# Altium PCB HarmonicControl_2.PcbDoc
Units mm, origin at the board's own origin, x right, y up, seen from the top; angles counter-clockwise.
Board outline 76.86 x 36.04 mm, 2 copper layers (Top Layer, Bottom Layer); 18 components, 24 nets, 82 pads, 11 vias.
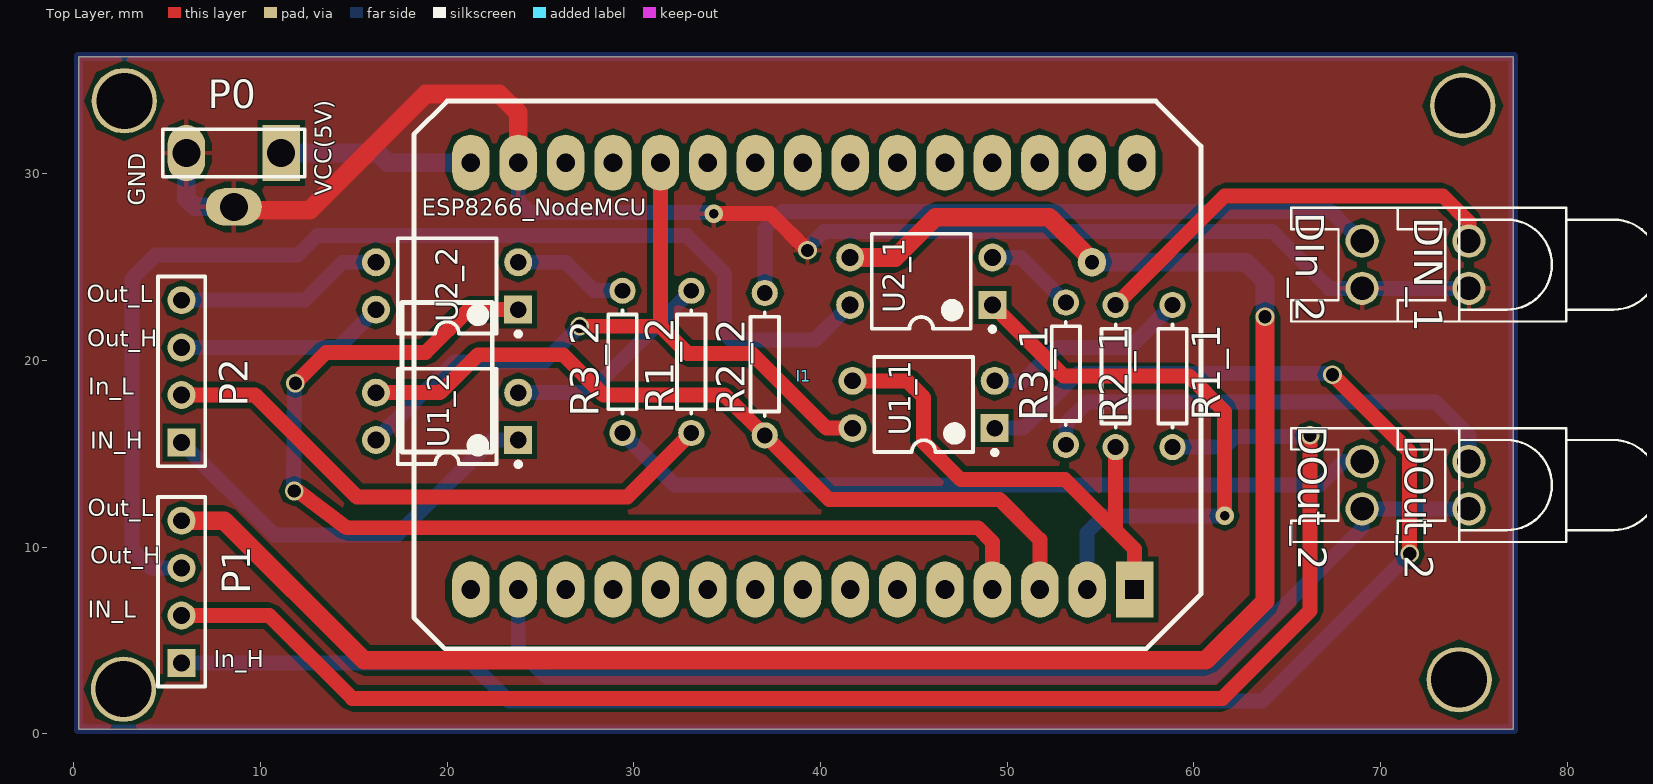
[diagram p0: Top Layer view]
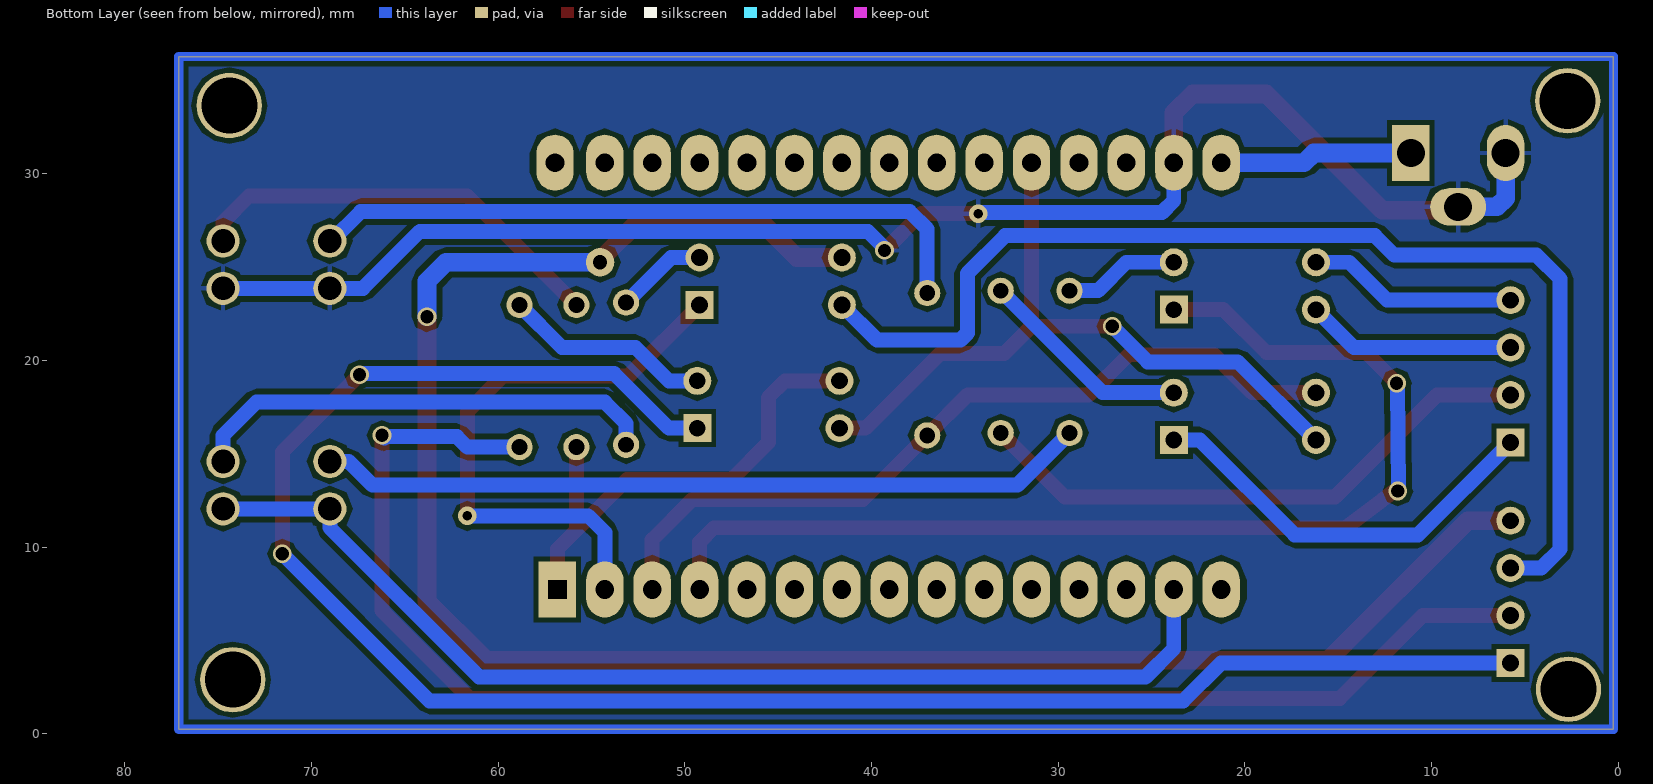
[diagram p1: Bottom Layer view, seen from below]

## Layer stack, top to bottom
Top Solder: solder mask 0.0102, Solder Resist, Dk 3.5
Top Layer: signal copper 0.0356
Dielectric 1: dielectric 0.32, FR-4, Dk 4.8
Bottom Layer: signal copper 0.0356
Bottom Solder: solder mask 0.0102, Solder Resist, Dk 3.5

## Board outline
0.25,0.25 77.109,0.25 77.109,36.287 0.25,36.287

## Design rules (kind name [scope] priority, off if disabled: settings)
Clearance [All] p1: gap=0.254 ignorepadtopadclearanceinfootprint=FALSE except(0: Arc-Hole Track-Hole SMDPad-Hole THPad-Hole Via-Hole Fill-Hole Poly-Hole Region-Hole Text-Hole)
PolygonConnect [All] p1: connectstyle=Relief reliefconductorwidth=0.254 reliefentries=4 polygonreliefangle="90 Angle" airgapwidth=0.254
RoutingVias [All] p1: holewidth=0.711 width=1.27 viastyle="Through Hole" minholewidth=0.711 minwidth=1.27 maxholewidth=0.711 maxwidth=1.27
SolderMaskExpansion [All] p1: expansion=0.102
Width [All] p1: maxlimit=1 minlimit=0.5 preferedwidth=0.8
30 further rules are at their usual default settings.

## Classes and differential pairs
component class HarmonicControl: DIN_1 DIn_2 DOut_2 I1 P0 P1 P2 R1_1 R1_2 R2_1 R2_2 R3_1 R3_2 U1_1 U1_2 U2_1 U2_2

## Components (designator, comment, footprint, x,y, rotation, side; value= is the part's Value field where it differs from the comment)
DIN_1 "LED0" LED-0 74.734,25.137 r90 top (schematic designator D1_1)
DIn_2 "LED0" LED-0 69.019,25.137 r90 top (schematic designator D1_2)
DOut_2 "LED0" LED-0 69.019,13.326 r90 top (schematic designator D2_2)
DOut_2 "LED0" LED-0 74.734,13.326 r90 top (schematic designator D2_1)
I1 "ESP8266" ESP8266_Node_MCU_V3 21.267,30.598 r270 top
P0 "Jack3.5mm" HDR1X3 11.107,31.113 r180 top
P1 "Cable" HDR1X4 5.773,3.801 r90 top
P2 "Cable" HDR1X4 5.773,15.612 r90 top
R1_1 "Res1" AXIAL-0.3 58.859,19.168 r90 top value=1K
R1_2 "Res1" AXIAL-0.3 33.078,19.93 r90 top value=1K
R2_1 "Res1" AXIAL-0.3 55.811,19.168 r90 top value=1K
R2_2 "Res1" AXIAL-0.3 37.015,19.803 r90 top value=1K
R3_1 "Res1" AXIAL-0.3 53.144,19.295 r90 top value=1K
R3_2 "Res1" AXIAL-0.3 29.395,19.93 r90 top value=1K
U1_1 "InputSignal" DIP-4 45.524,17.644 r180 top
U1_2 "InputSignal" DIP-4 19.997,17.009 r180 top
U2_1 "Output_Control" DIP-4 45.397,24.248 r180 top
U2_2 "Output_Control" DIP-4 19.997,23.994 r180 top

## Footprints (in the part's own frame and the unit in brackets; to place one, negate y for a bottom-side part, rotate by r counter-clockwise, add the part's x,y. Pads: shape width x height; smd on the part's side, far side on the other; paste and mask are expansions set on the pad)
AXIAL-0.3 [mm] "Axial Device, Thru-Hole; 2 Leads; 0.3 in Pin Spacing"
  round 1.4 hole 0.85: 1(-3.81,0) 2(3.81,0)
  silkscreen extent -2.77,-0.76 2.77,0.76
DIP-4 [mm] "DIP; 4 Leads; Row Spacing 7.62 mm; Pitch 2.54 mm"
  rect 1.5x1.5 hole 0.9: 1(-3.81,1.27)
  round 1.5 hole 0.9: 2(-3.81,-1.27) 3(3.81,-1.27) 4(3.81,1.27)
  silkscreen extent -3.94,-2.55 2.65,2.69, body extent -3.15,-2.5 3.15,2.5, height 5.6
ESP8266_Node_MCU_V3 [mm]
  rect 3x2 hole 1 square paste+0 mask+0.102: 1(22.86,35.56)
  oval 3x2 hole 1 paste+0 mask+0.102: 2(22.86,33.02) 3(22.86,30.48) 4(22.86,27.94) 5(22.86,25.4) 6(22.86,22.86) 7(22.86,20.32) 8(22.86,17.78) 9(22.86,15.24) 10(22.86,12.7) 11(22.86,10.16) 12(22.86,7.62) 13(22.86,5.08) 14(22.86,2.54) 15(22.86,0) 16(0,0) 17(0,2.54) 18(0,5.08) 19(0,7.62) 20(0,10.16) 21(0,12.7) 22(0,15.24) 23(0,17.78) 24(0,20.32) 25(0,22.86) 26(0,25.4) 27(0,27.94) 28(0,30.48) 29(0,33.02) 30(0,35.687)
  silkscreen extent -3.3,-3.68 26.04,39.12
HDR1X3 [mm] "Connector; Header; 3 Position"
  rect 2x3 hole 1.5: 1(0,0)
  oval 3x2 hole 1.5: 2(2.54,2.881)
  oval 2x3 hole 1.5: 3(5.08,0)
  silkscreen extent -1.27,-1.27 6.35,1.27
HDR1X4 [mm] "Connector; Header; 4 Position"
  rect 1.5x1.5 hole 0.9: 1(0,0)
  round 1.5 hole 0.9: 2(2.54,0) 3(5.08,0) 4(7.62,0)
  silkscreen extent -1.27,-1.27 8.89,1.27
LED-0 [mil] "LED; 2 Leads"
  round 70 hole 50: 1(50,0) 2(-50,0)
  silkscreen extent -120,-400 120,150

## Part data
DIN_1 DIn_2 DOut_2 DOut_2: "Typical INFRARED GaAs LED", LatestRevisionDate=08-Jul-2005, LatestRevisionNote="Mech Layer 1 removed.", PackageDescription="LED; 2 Leads", PackageReference=LED-0, Published=8-Jun-2000, Publisher="Altium Limited"
I1: library part ESP8266_Node_MCU_V3
P0: library part "Header 3", "Header, 3-Pin", LatestRevisionDate=17-Jul-2002, LatestRevisionNote="Re-released for DXP Platform.", Publisher="Altium Limited"
P1 P2: library part "Header 4", "Header, 4-Pin", LatestRevisionDate=17-Jul-2002, LatestRevisionNote="Re-released for DXP Platform.", Publisher="Altium Limited"
R1_1 R1_2 R2_1 R2_2 R3_1 R3_2: "Resistor", LatestRevisionDate=17-Jul-2002, LatestRevisionNote="Re-released for DXP Platform.", PackageDescription="Axial Device, Thru-Hole; 2 Leads; 0.3 in Pin Spacing", PackageReference=AXIAL-0.3, Published=8-Jun-2000, Publisher="Altium Limited"
U1_1 U1_2 U2_1 U2_2: library part Optoisolator1, "4-Pin Phototransistor Optocoupler", DatasheetVersion=Nov-2003, LatestRevisionDate=04-Mar-2005, LatestRevisionNote="Sch pins 3 & 4 Swapped.", PackageReference=DIP-4, Published=24-Mar-1999, Publisher="Altium Limited"

## Free pads (board coordinates)
  round 1.524 hole 0.762: 2(54.541,25.264)
  round 3.5 hole 3: 12(2.705,33.913) 15(74.405,33.659) 16(2.664,2.392) 17(74.214,2.901)

## Via types
v1: diameter 1, hole 0.711, Top Layer to Bottom Layer, 9 vias
v2: diameter 1, hole 0.5, Top Layer to Bottom Layer, 2 vias

## Nets (pads, with @x,y where several pads share a name; then routed paths per layer and width w, separated by ;. In a path a pad name is that pad's centre, name@x,y a point inside that pad or via, vN(x,y) a via of type N, cw(c..) or ccw(c..) an arc to the next point about the centre after c; other vN are vias at no path point)
GND: DIN_1.2 DIn_2.2 I1.17 P0.2 P0.3 | length 80.6
  Top Layer w0.8: v2(34.284,27.867) 37.332,27.867 v1(39.301,25.899)
  Top Layer w1: P0.2@9.623,28.058 12.631,28.058 18.854,34.281 22.791,34.281 23.807,33.265 I1.17
  Bottom Layer w0.8: I1.17 23.807,28.566 24.442,27.931 v2@34.094,27.931 ; v1@39.237,25.962 40.197,26.922 64.193,26.922 67.248,23.867 DIn_2.2 DIN_1.2
  Bottom Layer w1: P0.3 6.027,28.7 6.495,28.232 P0.2
NetD1_1_1: DIN_1.1 R2_1.2 | length 22.9
  Top Layer w0.8: R2_1.2 61.653,28.82 73.337,28.82 74.734,27.423 DIN_1.1
NetD1_2_1: DIn_2.1 R2_2.2 | length 36.5
  Bottom Layer w0.8: R2_2.2 37.015,27.042 37.949,27.976 67.368,27.976 68.937,26.407 DIn_2.1
NetD2_1_1: DOut_2.1@74.734,14.596 R3_1.1 | length 25.3
  Bottom Layer w0.8: R3_1.1 53.144,16.628 54.287,17.771 72.956,17.771 74.734,15.993 DOut_2.1@74.734,14.596
NetD2_1_2: DOut_2.2 I1.14 | length 59.1
  Bottom Layer w0.8: I1.14 23.807,4.563 25.324,3.046 61.018,3.046 69.019,11.047 69.019,12.056 DOut_2.2@74.734,12.056
NetD2_2_1: DOut_2.1@69.019,14.596 R3_2.1 | length 41.3
  Bottom Layer w0.8: R3_2.1 32.182,13.333 66.74,13.333 68.003,14.596 DOut_2.1@69.019,14.596
NetI1_1: I1.1 R2_1.1 U1_1.3 | length 26.9
  Top Layer w0.8: U1_1.3 44.635,18.914 45.524,18.025 45.524,15.612 47.518,13.618 53.106,13.618 55.811,10.913 ; R2_1.1 55.811,10.913 ; I1.1 56.827,9.897 55.811,10.913
NetI1_2: I1.2 U2_1.1 | length 31.2
  Top Layer w0.8: U2_1.1 53.017,19.168 59.748,19.168 61.653,17.263 v2(61.653,11.682)
  Bottom Layer w0.8: I1.2 54.287,10.793 55.176,11.682 v2(61.653,11.682)
NetI1_3: I1.3 R2_2.1 U1_2.3 | length 43.2
  Top Layer w0.8: U1_2.3 19.616,18.279 21.648,20.311 26.22,20.311 28.379,18.152 34.856,18.152 R2_2.1 40.444,12.564 49.588,12.564 51.747,10.405 I1.3
NetI1_4: I1.4 U2_2.1 | length 60.2
  Top Layer w0.8: v1@11.783,12.978 11.809,12.982 11.996,13.008 14.621,11.04 48.445,11.04 49.207,10.278 I1.4 ; v1(11.869,18.787) 13.52,20.438 18.854,20.438 21.14,22.724 U2_2.1
  Bottom Layer w0.8: v1@11.746,13.009 11.758,13.02 v1@11.817,18.715
  other v1: 11.805,13.008
NetI1_16: I1.16 P0.1 | length 10.4
  Bottom Layer w1: P0.1 16.314,31.113 16.829,30.598 I1.16
NetI1_20: I1.20 U1_1.4 U1_2.4 | length 39.1
  Top Layer w0.8: v1(27.109,21.835) 31.427,21.835 ; I1.20 31.427,21.835 ; U1_1.4 40.317,16.374 36.304,20.387 32.875,20.387 31.427,21.835
  Bottom Layer w0.8: U1_2.4 20.378,19.93 25.204,19.93 v1(27.109,21.835)
NetP1_1: P1.1 U1_1.1 | length 100.2
  Top Layer w0.8: v1@67.622,19.041 71.559,15.104 v1(71.559,9.643)
  Bottom Layer w0.8: P1.1 21.267,3.801 23.299,1.769 63.685,1.769 v1(71.559,9.643) ; U1_1.1 50.858,16.374 53.779,19.295 v1@67.368,19.295
  other v1: 67.431,19.231
NetP1_2: P1.2 R1_1.1 | length 81.1
  Top Layer w0.8: P1.2 10.472,6.341 14.91,1.903 61.533,1.903 66.225,6.595 v1@66.225,15.739
  Bottom Layer w0.8: R1_1.1 61.653,15.358 62.215,15.92 v1@66.033,15.92 ; v1@66.098,15.858 v1@66.033,15.92 ; v1(66.225,15.993) 66.152,15.92 v1@66.033,15.92
NetP1_3: P1.3 U2_1.4 | length 62
  Bottom Layer w0.8: P1.3 4.122,8.881 3.106,9.897 3.106,24.375 4.376,25.645 11.996,25.645 13.037,26.686 32.84,26.686 34.856,24.67 34.856,21.479 35.237,21.098 39.707,21.098 U2_1.4
NetP1_4: P1.4 pad.2 U2_1.3 | length 103.9
  Top Layer w1: P1.4 8.059,11.421 15.545,3.935 60.644,3.935 63.812,7.103 v1(63.812,22.343) ; U2_1.3 44,25.518 46.159,27.677 52.255,27.677 pad.2@54.414,25.518
  Bottom Layer w1: v1(54.541,25.264) 62.796,25.264 63.812,24.248 v1(63.812,22.343) ; v1@63.809,22.34 v1@63.809,22.343
NetP2_1: P2.1 U1_2.1 | length 22.2
  Bottom Layer w0.8: P2.1 10.726,10.659 17.33,10.659 22.41,15.739 U1_2.1
NetP2_2: P2.2 R1_2.1 | length 31
  Top Layer w0.8: P2.2 9.71,18.152 15.171,12.691 29.649,12.691 R1_2.1
NetP2_3: P2.3 U2_2.4 | length 11.3
  Bottom Layer w0.8: P2.3 14.155,20.692 U2_2.4
NetP2_4: P2.4 U2_2.3 | length 11.3
  Bottom Layer w0.8: P2.4 12.377,23.232 14.409,25.264 U2_2.3
NetR1_1_2: R1_1.2 U1_1.2 | length 11.2
  Bottom Layer w0.8: U1_1.2 50.858,18.914 52.636,20.692 56.573,20.692 R1_1.2
NetR1_2_2: R1_2.2 U1_2.2 | length 11.5
  Bottom Layer w0.8: U1_2.2 27.617,18.279 R1_2.2
NetR3_1_2: R3_1.2 U2_1.2 | length 4.9
  Bottom Layer w0.8: U2_1.2 50.731,25.518 R3_1.2
NetR3_2_2: R3_2.2 U2_2.2 | length 6.2
  Bottom Layer w0.8: U2_2.2 26.347,25.264 27.871,23.74 R3_2.2
pads on no net: I1.5 I1.6 I1.7 I1.8 I1.9 I1.10 I1.11 I1.12 I1.13 I1.15 I1.18 I1.19 I1.21 I1.22 I1.23 I1.24 I1.25 I1.26 I1.27 I1.28 I1.29 I1.30
copper on no net: | length 225.8
  Bottom Layer w0.5: 0.25,0.25 77.109,0.25 77.109,36.287 0.25,36.287 0.25,0.25

## Polygon pours and split planes (outlines as drawn)
GND on Bottom Layer "GND_L02_P031" (solid, remove dead copper, pour order 31): 0.25,36.287 77.109,36.287 77.109,0.25 0.25,0.25
GND on Bottom Layer "GND_L02_P029" (solid, remove dead copper, pour order 29): 0.058,36.444
GND on Top Layer "GND_L01_P027" (solid, remove dead copper, pour order 27): 0.25,36.287 0.25,0.25 77.109,0.25 77.109,36.287

## Silkscreen, mask and mechanical layers (free items; w line width, h text height)
Top Overlay:
  text "VCC(5V)" at 14.123,28.831 h1.52 r90
  text "GND" at 4.11,28.291 h1.52 r90
  text "Out_L" at 0.68,22.819 h1.52
  text "Out_H" at 0.73,20.447 h1.52
  text "In_L" at 0.783,17.873 h1.52
  text "IN_H" at 0.866,14.992 h1.52
  text "Out_L" at 0.75,11.355 h1.52
  text "Out_H" at 0.881,8.813 h1.52
  text "IN_L" at 0.75,5.912 h1.52
  text "In_H" at 7.497,3.272 h1.52

## Text inside footprints (layer, text, board x,y; h text height)
I1: Top Overlay "ESP8266_NodeMCU" at 18.648,27.47 h1.52